# EAGLE board MainBoard (EAGLE 6.1), part 1 of 2
REVISION: A; TITLE: Teton
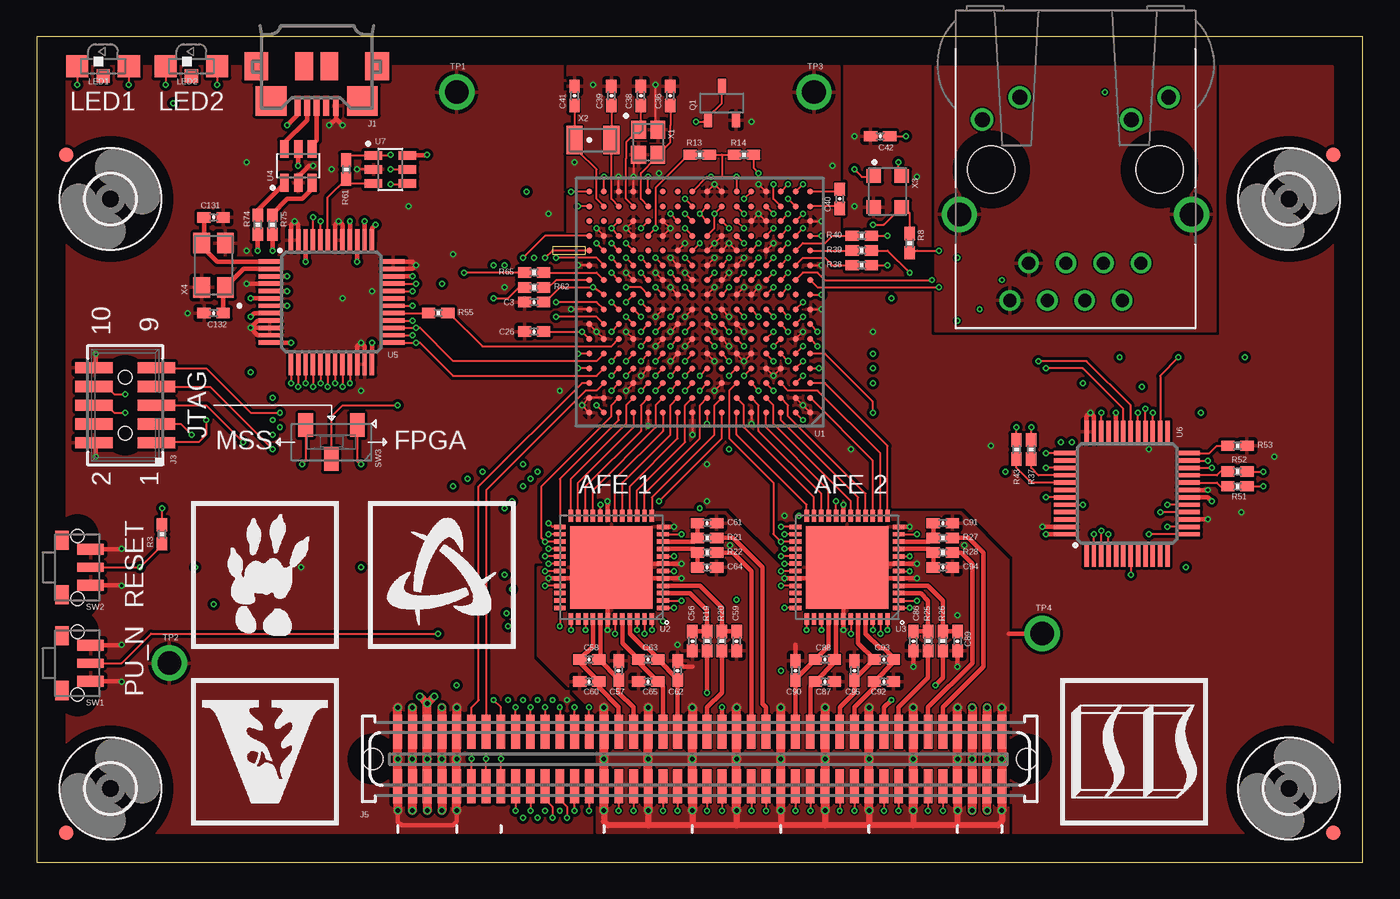
[diagram p0: board, top side]
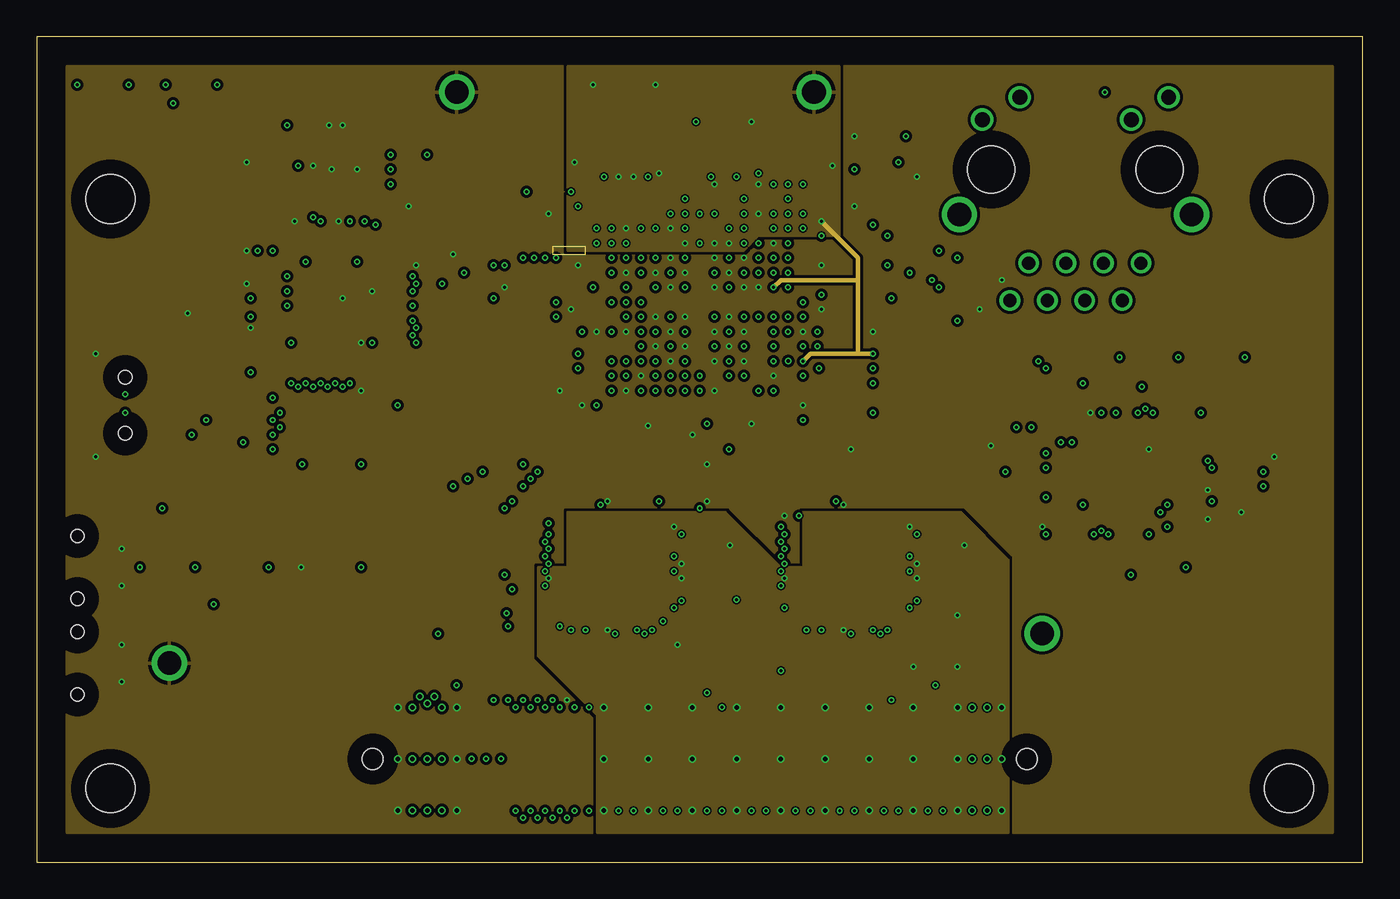
[diagram p1: board, inner layer GND]
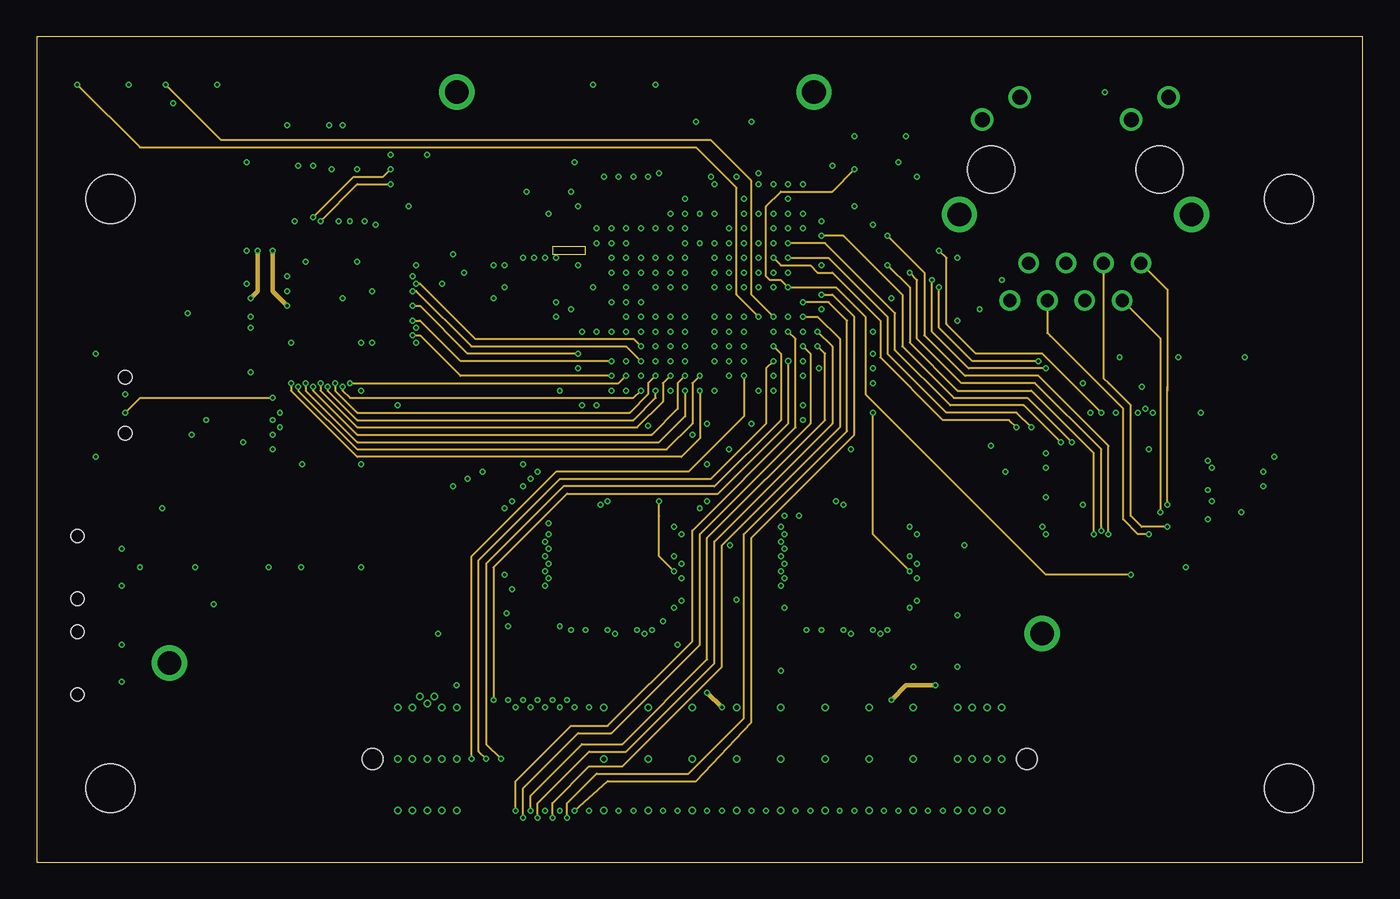
[diagram p2: board, inner layer Inner1]
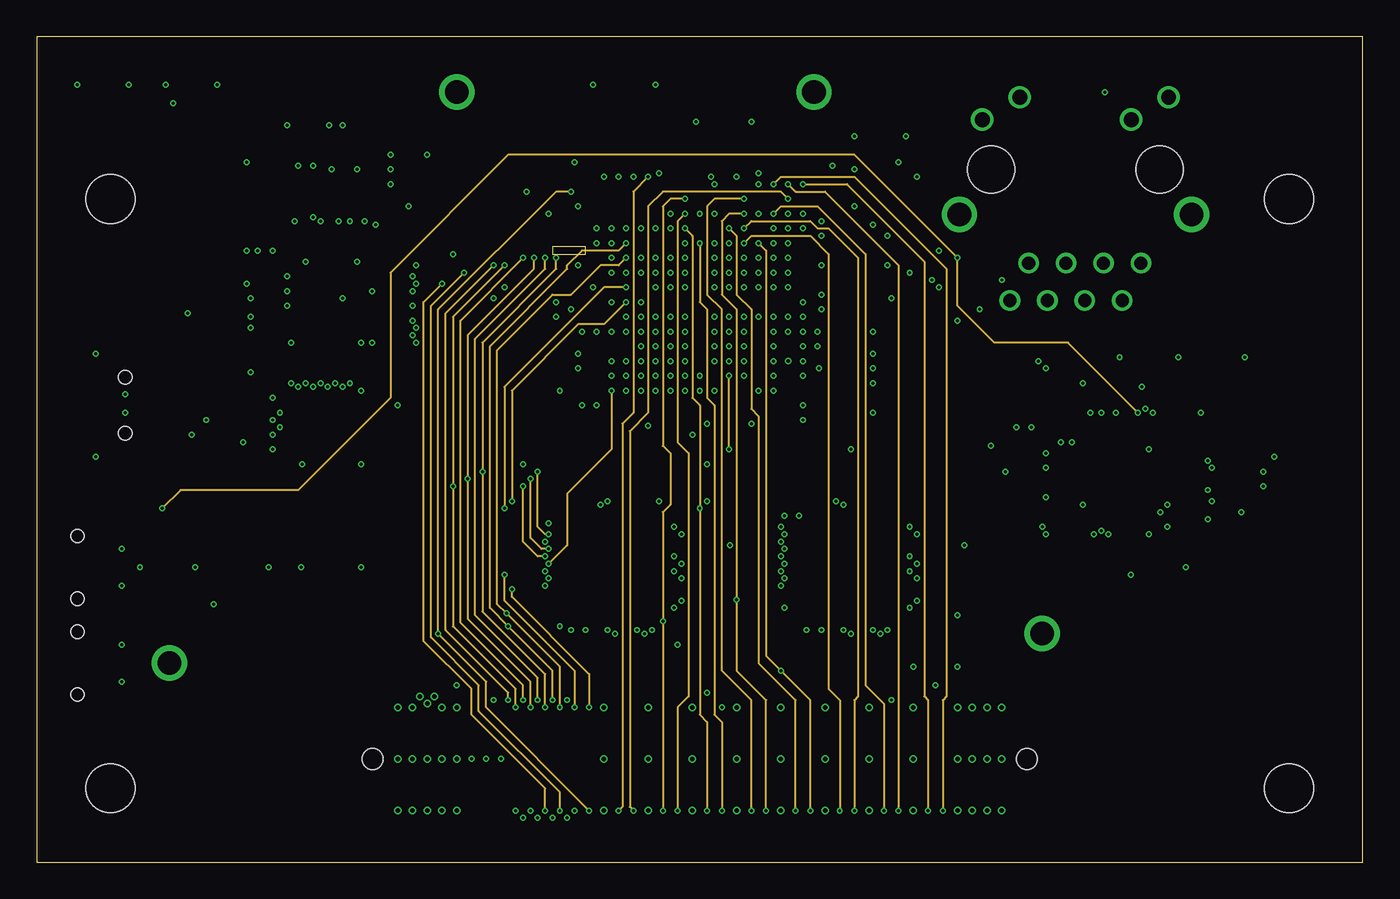
[diagram p3: board, inner layer Inner2]
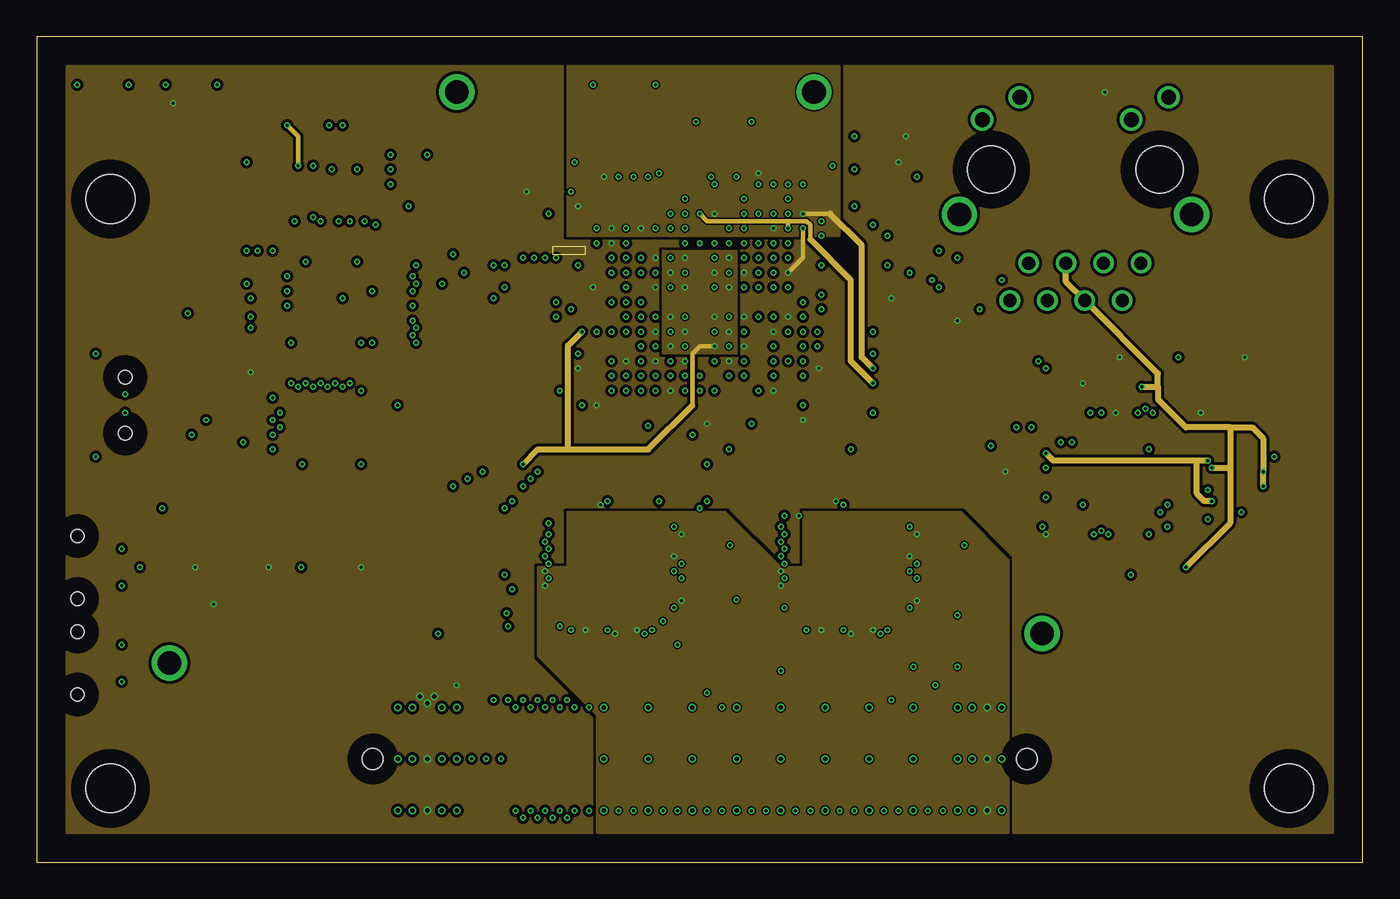
[diagram p4: board, inner layer D3V3]
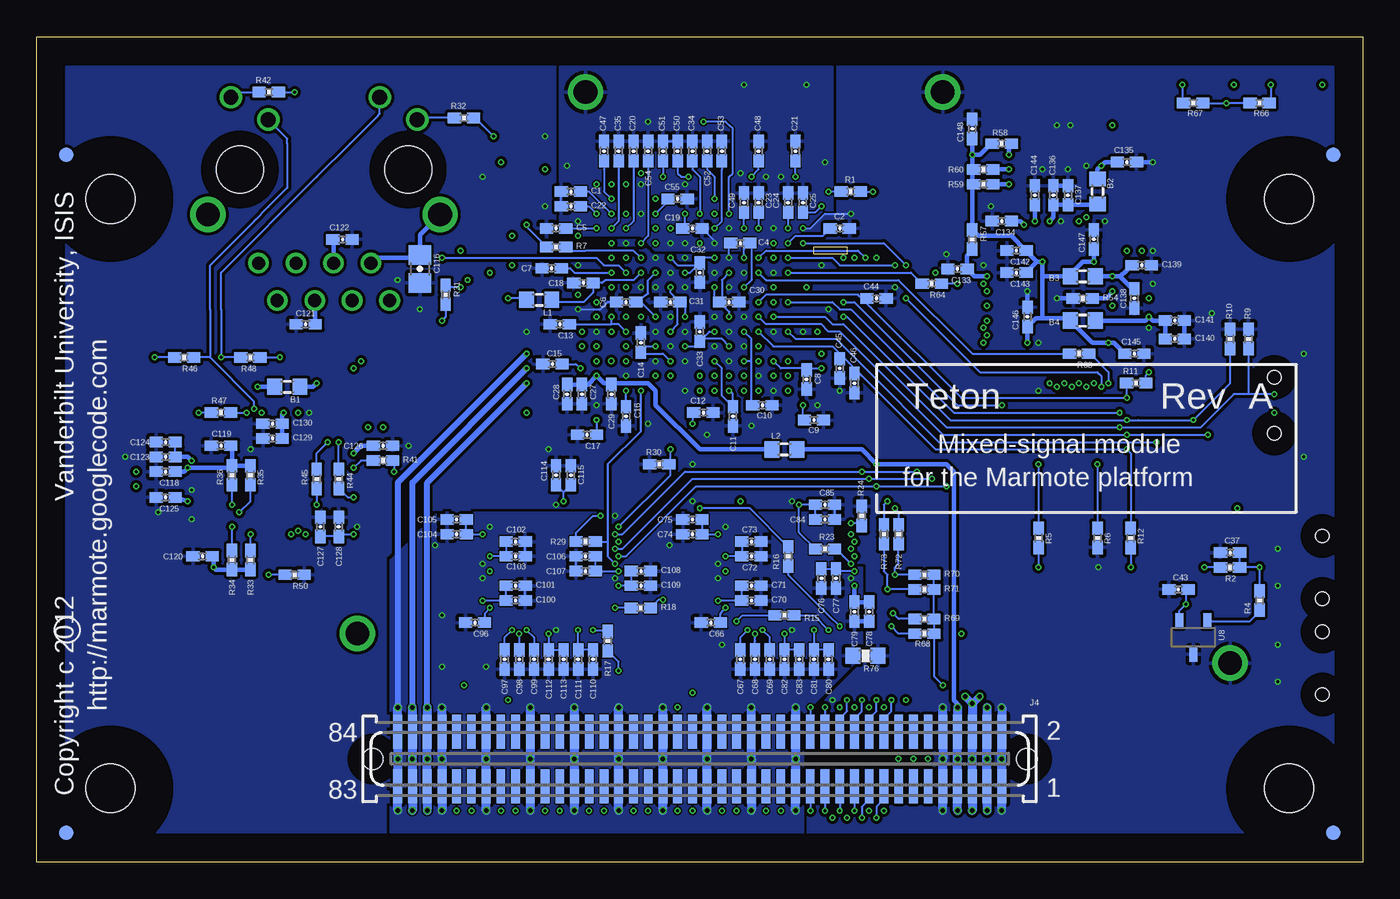
[diagram p5: board, bottom side, seen from below]

Size 90 x 56 mm. Coordinates in mm from the lower left corner, seen from the top.
Outline: 0,0 90,0 90,56 0,56 0,0
Copper layers (1*2*3+14*15*16): Top 0.0356mm / dielectric 5mil / GND 0.0356mm / dielectric 5mil / Inner1 0.0356mm / dielectric 40mil / Inner2 0.0356mm / dielectric 5mil / D3V3 0.0356mm / dielectric 5mil / Bottom 0.0356mm
Design rules: minimum track width 4mil, minimum drill 8mil, track to track 4mil, track to pad 4mil, pad to pad 4mil, via to via 4mil, smd to smd 4mil, copper to edge 40mil, drill to drill 8mil, minimum pad ring 10mil, minimum via ring 4mil, stop-mask expansion 2mil, vias tented up to drill 8mil, thermal gap 10mil
Milling: area 35,41.2 to 37.2,41.8

## Footprints (pad centres in the part's own frame; a part is rotated, then mirrored left to right if it is on the bottom)
L0603 = smd 1 x 1.1: 1 -0.85,0; 2 0.85,0
C0402 = smd 0.9 x 0.7: 1 -0.65,0; 2 0.65,0
C0805 = smd 1.3 x 1.5: 1 -0.95,0; 2 0.95,0
ZX62R-B-5P = smd 0.4 x 1.35: 1 1.3,2.675; 2 0.65,2.675; 3 0,2.675; 4 -0.65,2.675; 5 -1.3,2.675 | smd 2.1 x 2: MNT$1 -3.1,2.35; MNT$2 3.1,2.35 | smd 1.6 x 1.9: MNT$3 -4.1,0; MNT$4 4.1,0 | smd 1.2 x 1.9: MNT$5 -0.85,0; MNT$6 0.85,0
J0011D21B = drill 0.889: 1 4.445,-6.35; 2 3.175,-8.89; 3 1.905,-6.35; 4 0.635,-8.89; 5 -0.635,-6.35; 6 -1.905,-8.89; 7 -3.175,-6.35; 8 -4.445,-8.89 | drill 1.016: 9 6.325,4.902; 10 3.785,3.378; 11 -3.785,4.902; 12 -6.325,3.378 | drill 1.6: H$1 -7.874,-3.048; H$2 7.874,-3.048 | hole 3.2: -5.715,0; 5.715,0
FTSH-105-01-L-DV-K = smd 2.54 x 0.762: 1 -2.121,2.54; 2 2.121,2.54; 3 -2.121,1.27; 4 2.121,1.27; 5 -2.121,0; 6 2.121,0; 7 -2.121,-1.27; 8 2.121,-1.27; 9 -2.121,-2.54; 10 2.121,-2.54 | hole 0.94: 0,1.905; 0,-1.905
71742-3003-BOT = smd 0.6 x 2.3: 1 -20.5,1.85; 2 -20.5,-1.85; 3 -19.5,1.85; 4 -19.5,-1.85; 5 -18.5,1.85; 6 -18.5,-1.85; 7 -17.5,1.85; 8 -17.5,-1.85; 9 -16.5,1.85; 10 -16.5,-1.85; 11 -15.5,1.85; 12 -15.5,-1.85; 13 -14.5,1.85; 14 -14.5,-1.85; 15 -13.5,1.85; 16 -13.5,-1.85; 17 -12.5,1.85; 18 -12.5,-1.85; 19 -11.5,1.85; 20 -11.5,-1.85; 21 -10.5,1.85; 22 -10.5,-1.85; 23 -9.5,1.85; 24 -9.5,-1.85; 25 -8.5,1.85; 26 -8.5,-1.85; 27 -7.5,1.85; 28 -7.5,-1.85; 29 -6.5,1.85; 30 -6.5,-1.85; 31 -5.5,1.85; 32 -5.5,-1.85; 33 -4.5,1.85; 34 -4.5,-1.85; 35 -3.5,1.85; 36 -3.5,-1.85; 37 -2.5,1.85; 38 -2.5,-1.85; 39 -1.5,1.85; 40 -1.5,-1.85; 41 -0.5,1.85; 42 -0.5,-1.85; 43 0.5,1.85; 44 0.5,-1.85; 45 1.5,1.85; 46 1.5,-1.85; 47 2.5,1.85; 48 2.5,-1.85; 49 3.5,1.85; 50 3.5,-1.85; 51 4.5,1.85; 52 4.5,-1.85; 53 5.5,1.85; 54 5.5,-1.85; 55 6.5,1.85; 56 6.5,-1.85; 57 7.5,1.85; 58 7.5,-1.85; 59 8.5,1.85; 60 8.5,-1.85; 61 9.5,1.85; 62 9.5,-1.85; 63 10.5,1.85; 64 10.5,-1.85; 65 11.5,1.85; 66 11.5,-1.85; 67 12.5,1.85; 68 12.5,-1.85; 69 13.5,1.85; 70 13.5,-1.85; 71 14.5,1.85; 72 14.5,-1.85; 73 15.5,1.85; 74 15.5,-1.85; 75 16.5,1.85; 76 16.5,-1.85; 77 17.5,1.85; 78 17.5,-1.85; 79 18.5,1.85; 80 18.5,-1.85; 81 19.5,1.85; 82 19.5,-1.85; 83 20.5,1.85; 84 20.5,-1.85 | hole 1.4: -22.2,0; 22.2,0
71741-0002 = smd 0.6 x 2.3: 1 -20.5,-1.85; 2 -20.5,1.85; 3 -19.5,-1.85; 4 -19.5,1.85; 5 -18.5,-1.85; 6 -18.5,1.85; 7 -17.5,-1.85; 8 -17.5,1.85; 9 -16.5,-1.85; 10 -16.5,1.85; 11 -15.5,-1.85; 12 -15.5,1.85; 13 -14.5,-1.85; 14 -14.5,1.85; 15 -13.5,-1.85; 16 -13.5,1.85; 17 -12.5,-1.85; 18 -12.5,1.85; 19 -11.5,-1.85; 20 -11.5,1.85; 21 -10.5,-1.85; 22 -10.5,1.85; 23 -9.5,-1.85; 24 -9.5,1.85; 25 -8.5,-1.85; 26 -8.5,1.85; 27 -7.5,-1.85; 28 -7.5,1.85; 29 -6.5,-1.85; 30 -6.5,1.85; 31 -5.5,-1.85; 32 -5.5,1.85; 33 -4.5,-1.85; 34 -4.5,1.85; 35 -3.5,-1.85; 36 -3.5,1.85; 37 -2.5,-1.85; 38 -2.5,1.85; 39 -1.5,-1.85; 40 -1.5,1.85; 41 -0.5,-1.85; 42 -0.5,1.85; 43 0.5,-1.85; 44 0.5,1.85; 45 1.5,-1.85; 46 1.5,1.85; 47 2.5,-1.85; 48 2.5,1.85; 49 3.5,-1.85; 50 3.5,1.85; 51 4.5,-1.85; 52 4.5,1.85; 53 5.5,-1.85; 54 5.5,1.85; 55 6.5,-1.85; 56 6.5,1.85; 57 7.5,-1.85; 58 7.5,1.85; 59 8.5,-1.85; 60 8.5,1.85; 61 9.5,-1.85; 62 9.5,1.85; 63 10.5,-1.85; 64 10.5,1.85; 65 11.5,-1.85; 66 11.5,1.85; 67 12.5,-1.85; 68 12.5,1.85; 69 13.5,-1.85; 70 13.5,1.85; 71 14.5,-1.85; 72 14.5,1.85; 73 15.5,-1.85; 74 15.5,1.85; 75 16.5,-1.85; 76 16.5,1.85; 77 17.5,-1.85; 78 17.5,1.85; 79 18.5,-1.85; 80 18.5,1.85; 81 19.5,-1.85; 82 19.5,1.85; 83 20.5,-1.85; 84 20.5,1.85 | hole 1.4: -22.2,0; 22.2,0
LED1208-RA = smd 1.5 x 1.5: 1 -1.75,0; 2 1.75,0 | smd 0.9 x 0.9: 3 0,-0.65
3,3 = hole 3.3: 0,0
FIDUCIAL-1X2 = smd 1 x 1: 1 0,0
SOT23-3L = smd 1 x 0.55: 1 -1.15,0.95; 2 -1.15,-0.95; 3 1.15,0
R0402 = smd 0.9 x 0.7: 1 -0.65,0; 2 0.65,0
R0603 = smd 1 x 1.1: 1 -0.85,0; 2 0.85,0
TL3340 = smd 0.75 x 1.8: 1 1.225,2.4; 3 -1.225,2.4 | smd 0.6 x 1.8: 2 0,2.4 | smd 1.3 x 0.9: MNT$1 -1.85,0.45; MNT$2 1.85,0.45 | hole 0.9: 2.125,1.5; -2.125,1.5
SWITCH-DIP-CJS = smd 1 x 1.6: 1 -1.75,-1.15; 2 0,1.15; 3 1.75,-1.15
TESTPOINT = drill 1.6: 1 0,0
FG256 = smd 0.4 x 0.4: A1 -7.5,7.5; A2 -6.5,7.5; A3 -5.5,7.5; A4 -4.5,7.5; A5 -3.5,7.5; A6 -2.5,7.5; A7 -1.5,7.5; A8 -0.5,7.5; A9 0.5,7.5; A10 1.5,7.5; A11 2.5,7.5; A12 3.5,7.5; A13 4.5,7.5; A14 5.5,7.5; A15 6.5,7.5; A16 7.5,7.5; B1 -7.5,6.5; B2 -6.5,6.5; B3 -5.5,6.5; B4 -4.5,6.5; B5 -3.5,6.5; B6 -2.5,6.5; B7 -1.5,6.5; B8 -0.5,6.5; B9 0.5,6.5; B10 1.5,6.5; B11 2.5,6.5; B12 3.5,6.5; B13 4.5,6.5; B14 5.5,6.5; B15 6.5,6.5; B16 7.5,6.5; C1 -7.5,5.5; C2 -6.5,5.5; C3 -5.5,5.5; C4 -4.5,5.5; C5 -3.5,5.5; C6 -2.5,5.5; C7 -1.5,5.5; C8 -0.5,5.5; C9 0.5,5.5; C10 1.5,5.5; C11 2.5,5.5; C12 3.5,5.5; C13 4.5,5.5; C14 5.5,5.5; C15 6.5,5.5; C16 7.5,5.5; D1 -7.5,4.5; D2 -6.5,4.5; D3 -5.5,4.5; D4 -4.5,4.5; D5 -3.5,4.5; D6 -2.5,4.5; D7 -1.5,4.5; D8 -0.5,4.5; D9 0.5,4.5; D10 1.5,4.5; D11 2.5,4.5; D12 3.5,4.5; D13 4.5,4.5; D14 5.5,4.5; D15 6.5,4.5; D16 7.5,4.5; E1 -7.5,3.5; E2 -6.5,3.5; E3 -5.5,3.5; E4 -4.5,3.5; E5 -3.5,3.5; E6 -2.5,3.5; E7 -1.5,3.5; E8 -0.5,3.5; E9 0.5,3.5; E10 1.5,3.5; E11 2.5,3.5; E12 3.5,3.5; E13 4.5,3.5; E14 5.5,3.5; E15 6.5,3.5; E16 7.5,3.5; F1 -7.5,2.5; F2 -6.5,2.5; F3 -5.5,2.5; F4 -4.5,2.5; F5 -3.5,2.5; F6 -2.5,2.5; F7 -1.5,2.5; F8 -0.5,2.5; F9 0.5,2.5; F10 1.5,2.5; F11 2.5,2.5; F12 3.5,2.5; F13 4.5,2.5; F14 5.5,2.5; F15 6.5,2.5; F16 7.5,2.5; G1 -7.5,1.5; G2 -6.5,1.5; G3 -5.5,1.5; G4 -4.5,1.5; G5 -3.5,1.5; G6 -2.5,1.5; G7 -1.5,1.5; G8 -0.5,1.5; G9 0.5,1.5; G10 1.5,1.5; G11 2.5,1.5; G12 3.5,1.5; G13 4.5,1.5; G14 5.5,1.5; G15 6.5,1.5; G16 7.5,1.5; H1 -7.5,0.5; H2 -6.5,0.5; H3 -5.5,0.5; H4 -4.5,0.5; H5 -3.5,0.5; H6 -2.5,0.5; H7 -1.5,0.5; H8 -0.5,0.5; H9 0.5,0.5; H10 1.5,0.5; H11 2.5,0.5; H12 3.5,0.5; H13 4.5,0.5; H14 5.5,0.5; H15 6.5,0.5; H16 7.5,0.5; J1 -7.5,-0.5; J2 -6.5,-0.5; J3 -5.5,-0.5; J4 -4.5,-0.5; J5 -3.5,-0.5; J6 -2.5,-0.5; J7 -1.5,-0.5; J8 -0.5,-0.5; J9 0.5,-0.5; J10 1.5,-0.5; J11 2.5,-0.5; J12 3.5,-0.5; J13 4.5,-0.5; J14 5.5,-0.5; J15 6.5,-0.5; J16 7.5,-0.5; K1 -7.5,-1.5; K2 -6.5,-1.5; K3 -5.5,-1.5; K4 -4.5,-1.5; K5 -3.5,-1.5; K6 -2.5,-1.5; K7 -1.5,-1.5; K8 -0.5,-1.5; K9 0.5,-1.5; K10 1.5,-1.5; K11 2.5,-1.5; K12 3.5,-1.5; K13 4.5,-1.5; K14 5.5,-1.5; K15 6.5,-1.5; K16 7.5,-1.5; L1 -7.5,-2.5; L2 -6.5,-2.5; L3 -5.5,-2.5; L4 -4.5,-2.5; L5 -3.5,-2.5; L6 -2.5,-2.5; L7 -1.5,-2.5; L8 -0.5,-2.5; L9 0.5,-2.5; L10 1.5,-2.5; L11 2.5,-2.5; L12 3.5,-2.5; L13 4.5,-2.5; L14 5.5,-2.5; L15 6.5,-2.5; L16 7.5,-2.5; M1 -7.5,-3.5; M2 -6.5,-3.5; M3 -5.5,-3.5; M4 -4.5,-3.5; M5 -3.5,-3.5; M6 -2.5,-3.5; M7 -1.5,-3.5; M8 -0.5,-3.5; M9 0.5,-3.5; M10 1.5,-3.5; M11 2.5,-3.5; M12 3.5,-3.5; M13 4.5,-3.5; M14 5.5,-3.5; M15 6.5,-3.5; M16 7.5,-3.5; N1 -7.5,-4.5; N2 -6.5,-4.5; N3 -5.5,-4.5; N4 -4.5,-4.5; N5 -3.5,-4.5; N6 -2.5,-4.5; N7 -1.5,-4.5; N8 -0.5,-4.5; N9 0.5,-4.5; N10 1.5,-4.5; N11 2.5,-4.5; N12 3.5,-4.5; N13 4.5,-4.5; N14 5.5,-4.5; N15 6.5,-4.5; N16 7.5,-4.5; P1 -7.5,-5.5; P2 -6.5,-5.5; P3 -5.5,-5.5; P4 -4.5,-5.5; P5 -3.5,-5.5; P6 -2.5,-5.5; P7 -1.5,-5.5; P8 -0.5,-5.5; P9 0.5,-5.5; P10 1.5,-5.5; P11 2.5,-5.5; P12 3.5,-5.5; P13 4.5,-5.5; P14 5.5,-5.5; P15 6.5,-5.5; P16 7.5,-5.5; R1 -7.5,-6.5; R2 -6.5,-6.5; R3 -5.5,-6.5; R4 -4.5,-6.5; R5 -3.5,-6.5; R6 -2.5,-6.5; R7 -1.5,-6.5; R8 -0.5,-6.5; R9 0.5,-6.5; R10 1.5,-6.5; R11 2.5,-6.5; R12 3.5,-6.5; R13 4.5,-6.5; R14 5.5,-6.5; R15 6.5,-6.5; R16 7.5,-6.5; T1 -7.5,-7.5; T2 -6.5,-7.5; T3 -5.5,-7.5; T4 -4.5,-7.5; T5 -3.5,-7.5; T6 -2.5,-7.5; T7 -1.5,-7.5; T8 -0.5,-7.5; T9 0.5,-7.5; T10 1.5,-7.5; T11 2.5,-7.5; T12 3.5,-7.5; T13 4.5,-7.5; T14 5.5,-7.5; T15 6.5,-7.5; T16 7.5,-7.5
TQFN-48 = smd 0.8 x 0.3: 1 -3.5,2.75; 2 -3.5,2.25; 3 -3.5,1.75; 4 -3.5,1.25; 5 -3.5,0.75; 6 -3.5,0.25; 7 -3.5,-0.25; 8 -3.5,-0.75; 9 -3.5,-1.25; 10 -3.5,-1.75; 11 -3.5,-2.25; 12 -3.5,-2.75; 25 3.5,-2.75; 26 3.5,-2.25; 27 3.5,-1.75; 28 3.5,-1.25; 29 3.5,-0.75; 30 3.5,-0.25; 31 3.5,0.25; 32 3.5,0.75; 33 3.5,1.25; 34 3.5,1.75; 35 3.5,2.25; 36 3.5,2.75 | smd 0.3 x 0.8: 13 -2.75,-3.5; 14 -2.25,-3.5; 15 -1.75,-3.5; 16 -1.25,-3.5; 17 -0.75,-3.5; 18 -0.25,-3.5; 19 0.25,-3.5; 20 0.75,-3.5; 21 1.25,-3.5; 22 1.75,-3.5; 23 2.25,-3.5; 24 2.75,-3.5; 37 2.75,3.5; 38 2.25,3.5; 39 1.75,3.5; 40 1.25,3.5; 41 0.75,3.5; 42 0.25,3.5; 43 -0.25,3.5; 44 -0.75,3.5; 45 -1.25,3.5; 46 -1.75,3.5; 47 -2.25,3.5; 48 -2.75,3.5 | smd 5.6 x 5.6: EXP 0,0
SOT23-6L = smd 1.2 x 0.6: 1 -1.15,0.95; 2 -1.15,0; 3 -1.15,-0.95; 4 1.15,-0.95; 5 1.15,0; 6 1.15,0.95
LQFP-48 = smd 1.5 x 0.3: 1 -4.2,2.75; 2 -4.2,2.25; 3 -4.2,1.75; 4 -4.2,1.25; 5 -4.2,0.75; 6 -4.2,0.25; 7 -4.2,-0.25; 8 -4.2,-0.75; 9 -4.2,-1.25; 10 -4.2,-1.75; 11 -4.2,-2.25; 12 -4.2,-2.75; 25 4.2,-2.75; 26 4.2,-2.25; 27 4.2,-1.75; 28 4.2,-1.25; 29 4.2,-0.75; 30 4.2,-0.25; 31 4.2,0.25; 32 4.2,0.75; 33 4.2,1.25; 34 4.2,1.75; 35 4.2,2.25; 36 4.2,2.75 | smd 0.3 x 1.5: 13 -2.75,-4.2; 14 -2.25,-4.2; 15 -1.75,-4.2; 16 -1.25,-4.2; 17 -0.75,-4.2; 18 -0.25,-4.2; 19 0.25,-4.2; 20 0.75,-4.2; 21 1.25,-4.2; 22 1.75,-4.2; 23 2.25,-4.2; 24 2.75,-4.2; 37 2.75,4.2; 38 2.25,4.2; 39 1.75,4.2; 40 1.25,4.2; 41 0.75,4.2; 42 0.25,4.2; 43 -0.25,4.2; 44 -0.75,4.2; 45 -1.25,4.2; 46 -1.75,4.2; 47 -2.25,4.2; 48 -2.75,4.2
ECX-2236 = smd 1.2 x 1: 1 -0.85,-0.65; 2 0.85,-0.65; 3 0.85,0.65; 4 -0.85,0.65
ECX-31B = smd 1.1 x 1.9: 1 -1.25,0; 2 1.25,0
ASEM1 = smd 0.9 x 1: 1 -1.05,-0.95; 2 1.05,-0.95; 3 1.05,0.95; 4 -1.05,0.95
ECX-42 = smd 1.4 x 1.15: 1 -1.5,-0.8; 2 1.5,-0.8; 3 1.5,0.8; 4 -1.5,0.8

## Placement (x,y rotation side)
B1  70R/4A  [L0603]  73,32.25 180 bottom
B2  600R/0.5A  [L0603]  18,45.5 270 bottom
B3  600R/0.5A  [L0603]  19,39.75 0 bottom
B4  600R/0.5A  [L0603]  19,36.75 0 bottom
C1  2.2uF  [C0402]  53.75,45.5 180 bottom
C2  0.1uF  [C0402]  35.5,43 0 bottom
C3  0.1uF  [C0402]  33.75,38 180 top
C4  0.1uF  [C0402]  42.25,42 180 bottom
C5  0.1uF  [C0402]  54.75,43 180 bottom
C6  0.1uF  [C0402]  50,38 180 bottom
C7  0.1uF  [C0402]  55.05,40.3 180 bottom
C8  0.1uF  [C0402]  37.75,32.75 270 bottom
C9  0.1uF  [C0402]  37.25,30 0 bottom
C10  0.1uF  [C0402]  40.75,31 0 bottom
C11  0.1uF  [C0402]  42.75,30.25 270 bottom
C12  0.1uF  [C0402]  44.75,30.5 0 bottom
C13  0.1uF  [C0402]  54.5,36.5 180 bottom
C14  0.1uF  [C0402]  49,35.25 90 bottom
C15  0.1uF  [C0402]  55,33.8 180 bottom
C16  0.1uF  [C0402]  50,30.25 270 bottom
C17  0.1uF  [C0402]  52.65,29 180 bottom
C18  0.1uF  [C0402]  52.9,39.3 180 bottom
C19  0.1uF  [C0402]  45.5,43 0 bottom
C20  0.1uF  [C0402]  49.5,48.25 90 bottom
C21  0.1uF  [C0402]  38.5,48.25 90 bottom
C22  0.1uF  [C0402]  53.75,44.5 180 bottom
C23  0.1uF  [C0402]  41,44.75 90 bottom
C24  0.1uF  [C0402]  39,44.75 90 bottom
C25  0.1uF  [C0402]  38,44.75 90 bottom
C26  0.1uF  [C0402]  33.75,36 180 top
C27  4.7uF  [C0402]  53,31.75 270 bottom
C28  0.1uF  [C0402]  54,31.75 270 bottom
C29  0.01uF  [C0402]  51,31.75 270 bottom
C30  0.1uF  [C0402]  43,38 0 bottom
C31  0.1uF  [C0402]  47,38 180 bottom
C32  0.1uF  [C0402]  45,40 270 bottom
C33  0.1uF  [C0402]  45,36 90 bottom
C34  0.1uF  [C0402]  45.5,48.25 90 bottom
C35  0.1uF  [C0402]  50.5,48.25 90 bottom
C36  10pF  [C0402]  43,52 90 top
C37  0.1uF  [C0402]  9,21 180 bottom
C38  10pF  [C0402]  41,52 90 top
C39  4pF  [C0402]  39,52 90 top
C40  2.2uF  [C0402]  54.5,45 90 top
C41  4pF  [C0402]  36.5,52 90 top
C42  0.01uF  [C0402]  57.25,49.25 180 top
C43  0.1uF  [C0402]  12.5,18.5 180 bottom
C44  0.1uF  [C0402]  33,38.25 0 bottom
C45  0.33uF  [C0402]  35.5,33.5 270 bottom
C46  0.01uF  [C0402]  34.5,32.5 270 bottom
C47  [C0402]  51.5,48.25 90 bottom
C48  [C0402]  41,48.25 90 bottom
C49  4.7uF  [C0402]  42,44.75 90 bottom
C50  4.7uF  [C0402]  46.5,48.25 90 bottom
C51  4.7uF  [C0402]  47.5,48.25 90 bottom
C52  [C0402]  44.5,48.25 90 bottom
C53  [C0402]  43.5,48.25 90 bottom
C54  [C0402]  48.5,48.25 90 bottom
C55  [C0402]  46.5,45 0 bottom
C56  22pF  [C0402]  44.5,15 270 top
C57  [C0402]  39.5,13 90 top
C58  [C0402]  37.5,13.75 180 top
C59  22pF  [C0402]  47.5,15 90 top
C60  [C0402]  37.5,12.25 0 top
C61  22pF  [C0402]  45.5,23 0 top
C62  [C0402]  43.5,13 90 top
C63  [C0402]  41.5,13.75 180 top
C64  22pF  [C0402]  45.5,20 180 top
C65  [C0402]  41.5,12.25 0 top
C66  0.33uF  [C0402]  44.25,16.25 180 bottom
C67  0.33uF  [C0402]  42.25,13.75 270 bottom
C68  0.33uF  [C0402]  41.25,13.75 270 bottom
C69  0.1uF  [C0402]  40.25,13.75 270 bottom
C70  2.2uF  [C0402]  41.5,17.75 0 bottom
C71  0.1uF  [C0402]  41.5,18.75 0 bottom
C72  2.2uF  [C0402]  41.5,20.75 0 bottom
C73  0.1uF  [C0402]  41.5,21.75 0 bottom
C74  2.2uF  [C0402]  45.5,22.25 180 bottom
C75  0.1uF  [C0402]  45.5,23.25 180 bottom
C76  2.2uF  [C0402]  36.75,19.25 270 bottom
C77  0.1uF  [C0402]  35.75,19.25 270 bottom
C78  2.2uF  [C0402]  33.5,17 270 bottom
C79  0.1uF  [C0402]  34.5,17 270 bottom
C80  2.2uF  [C0402]  36.25,13.75 270 bottom
C81  0.1uF  [C0402]  37.25,13.75 270 bottom
C82  2.2uF  [C0402]  39.25,13.75 270 bottom
C83  0.1uF  [C0402]  38.25,13.75 270 bottom
C84  2.2uF  [C0402]  36.5,23.25 0 bottom
C85  0.1uF  [C0402]  36.5,24.25 0 bottom
C86  22pF  [C0402]  59.5,15 270 top
C87  [C0402]  53.5,12.25 0 top
C88  [C0402]  53.5,13.75 180 top
C89  22pF  [C0402]  62.5,15 90 top
C90  [C0402]  51.5,13 270 top
C91  22pF  [C0402]  61.5,23 0 top
C92  [C0402]  57.5,12.25 0 top
C93  [C0402]  57.5,13.75 180 top
C94  22pF  [C0402]  61.5,20 180 top
C95  [C0402]  55.5,13 270 top
C96  0.33uF  [C0402]  60.25,16.25 180 bottom
C97  0.33uF  [C0402]  58.25,13.75 270 bottom
C98  0.33uF  [C0402]  57.25,13.75 270 bottom
C99  0.1uF  [C0402]  56.25,13.75 270 bottom
C100  2.2uF  [C0402]  57.5,17.75 0 bottom
C101  0.1uF  [C0402]  57.5,18.75 0 bottom
C102  2.2uF  [C0402]  57.5,20.75 0 bottom
C103  0.1uF  [C0402]  57.5,21.75 0 bottom
C104  2.2uF  [C0402]  61.5,22.25 180 bottom
C105  0.1uF  [C0402]  61.5,23.25 180 bottom
C106  2.2uF  [C0402]  52.75,20.75 180 bottom
C107  0.1uF  [C0402]  52.75,19.75 180 bottom
C108  2.2uF  [C0402]  49,19.75 0 bottom
C109  0.1uF  [C0402]  49,18.75 0 bottom
C110  2.2uF  [C0402]  52.25,13.75 270 bottom
C111  0.1uF  [C0402]  53.25,13.75 270 bottom
C112  2.2uF  [C0402]  55.25,13.75 270 bottom
C113  0.1uF  [C0402]  54.25,13.75 270 bottom
C114  2.2uF  [C0402]  54.75,26.25 90 bottom
C115  0.1uF  [C0402]  53.75,26.25 90 bottom
C116  1000pF  [C0805]  64,40.25 270 bottom
C118  0.1uF  [C0402]  81.25,26.5 180 bottom
C119  0.1uF  [C0402]  77.5,28.25 180 bottom
C120  0.1uF  [C0402]  78.75,20.75 180 bottom
C121  0.1uF  [C0402]  71.75,36.5 180 bottom
C122  0.1uF  [C0402]  69.25,42.25 0 bottom
C123  4.7uF  [C0402]  81.25,27.5 180 bottom
C124  0.1uF  [C0402]  81.25,28.5 180 bottom
C125  0.1uF  [C0402]  81.25,24.75 180 bottom
C126  0.1uF  [C0402]  66.5,28.25 0 bottom
C127  4.7uF  [C0402]  70.75,22.75 90 bottom
C128  0.1uF  [C0402]  69.5,22.75 90 bottom
C129  4.7uF  [C0402]  74,28.75 180 bottom
C130  0.1uF  [C0402]  74,29.75 180 bottom
C131  10pF  [C0402]  12,43.75 0 top
C132  10pF  [C0402]  12,37.25 180 top
C133  0.01uF  [C0402]  27.5,40.25 180 bottom
C134  0.1uF  [C0402]  24.5,43.5 180 bottom
C135  0.01uF  [C0402]  16,47.5 0 bottom
C136  4.7uF  [C0402]  21,45.25 90 bottom
C137  0.1uF  [C0402]  20,45.25 90 bottom
C138  4.7uF  [C0402]  15.5,38.25 270 bottom
C139  0.1uF  [C0402]  15,40.5 0 bottom
C140  4.7uF  [C0402]  12.75,35.5 0 bottom
C141  0.1uF  [C0402]  12.75,36.75 0 bottom
C142  4.7uF  [C0402]  23.5,41.5 180 bottom
C143  0.1uF  [C0402]  23.5,40 180 bottom
C144  0.1uF  [C0402]  22.25,45.25 90 bottom
C145  0.1uF  [C0402]  15.5,34.5 0 bottom
C146  0.1uF  [C0402]  22.75,37 90 bottom
C147  0.1uF  [C0402]  18.25,42.25 90 bottom
C148  0.1uF  [C0402]  26.5,49.75 90 bottom
J1  CON-ZX62R-B-5P  [ZX62R-B-5P]  19,54 180 top
J2  CON-RJ45-J0011D21BNL  [J0011D21B]  70.5,47 0 top
J3  CON-FTSH-105-01-L-DV-K  [FTSH-105-01-L-DV-K]  6,31 180 top
J4  CON-71741-2184-BOT  [71742-3003-BOT]  45,7 180 bottom
J5  CON-71741-2184-TOP  [71741-0002]  45,7 0 top
L1  33nH  [L0603]  55.9,38.15 180 bottom
L2  33nH  [L0603]  39.25,28 0 bottom
LED1  [LED1208-RA]  4.5,54 0 top
LED2  [LED1208-RA]  10.5,54 0 top
LOGO1  LOGO-VANDERBILT-600MIL-10MM-SS  [LOGO-VANDERBILT-10MM-SILKSCREEN]  10.5,2.5 0 top
LOGO2  LOGO-ISIS-600MIL-10MM-SS  [LOGO-ISIS-10MM-SILKSCREEN]  69.5,2.5 0 top
LOGO3  LOGO-MARMOTE-600MIL-10MM-SS  [LOGO-MARMOTE-10MM-SILKSCREEN]  10.5,14.5 0 top
LOGO4  LOGO-SMARTFUSION-600MIL-10MM-SS  [LOGO-SMARTFUSION-10MM-SILKSCREEN]  22.5,14.5 0 top
M1  MOUNT-HOLE3.3  [3,3]  5,5 0 top
M2  MOUNT-HOLE3.3  [3,3]  5,45 0 top
M3  MOUNT-HOLE3.3  [3,3]  85,45 0 top
M4  MOUNT-HOLE3.3  [3,3]  85,5 0 top
M5  FIDUCIAL1X2  [FIDUCIAL-1X2]  2,2 0 top
M6  FIDUCIAL1X2  [FIDUCIAL-1X2]  2,48 0 top
M7  FIDUCIAL1X2  [FIDUCIAL-1X2]  88,48 0 top
M8  FIDUCIAL1X2  [FIDUCIAL-1X2]  88,2 0 top
M9  FIDUCIAL1X2  [FIDUCIAL-1X2]  2,2 90 bottom
M10  FIDUCIAL1X2  [FIDUCIAL-1X2]  2,48 0 bottom
M11  FIDUCIAL1X2  [FIDUCIAL-1X2]  88,48 0 bottom
M12  FIDUCIAL1X2  [FIDUCIAL-1X2]  88,2 0 bottom
Q1  MMBT3904  [SOT23-3L]  46.5,51.5 90 top
R1  10k  [R0402]  34.75,45.5 180 bottom
R2  10k  [R0402]  9,20 180 bottom
R3  39  [R0402]  8.5,22.25 90 top
R4  0  [R0402]  7,17.75 90 bottom
R5  1k  [R0402]  22,22 270 bottom
R6  1k  [R0402]  18,22 90 bottom
R7  39  [R0402]  54.75,41.75 0 bottom
R8  39  [R0402]  59.25,42 270 top
R9  1k  [R0402]  7.75,35.5 270 bottom
R10  1k  [R0402]  9,35.5 270 bottom
R11  0  [R0402]  15.37,32.5 0 bottom
R12  0  [R0402]  15.75,22 270 bottom
R13  0  [R0402]  45,48 0 top
R14  0  [R0402]  48,48 0 top
R15  0  [R0402]  39.25,16.75 180 bottom
R16  0  [R0402]  39,20.75 90 bottom
R17  0  [R0402]  51.25,15 270 bottom
R18  0  [R0402]  49,17.25 0 bottom
R19  24.9  [R0402]  45.5,15 270 top
R20  24.9  [R0402]  46.5,15 270 top
R21  24.9  [R0402]  45.5,22 0 top
R22  24.9  [R0402]  45.5,21 0 top
R23  100k  [R0402]  36.5,21.25 180 bottom
R24  100k  [R0402]  34,23.5 270 bottom
R25  24.9  [R0402]  60.5,15 270 top
R26  24.9  [R0402]  61.5,15 270 top
R27  24.9  [R0402]  61.5,22 0 top
R28  24.9  [R0402]  61.5,21 0 top
R29  100k  [R0402]  52.75,21.75 180 bottom
R30  100k  [R0402]  47.75,27 0 bottom
R31  1.5k  [R0402]  62.25,38.5 270 bottom
R32  100  [R0402]  61,50.5 0 bottom
R33  49.9  [R0402]  75.5,20.5 270 bottom
R34  49.9  [R0402]  76.75,20.5 270 bottom
R35  49.9  [R0402]  75.5,26.25 90 bottom
R36  49.9  [R0402]  76.75,26.25 90 bottom
R37  22  [R0402]  67.5,28 270 top
R38  22  [R0402]  56,40.5 0 top
R39  22  [R0402]  56,41.5 0 top
R40  22  [R0402]  56,42.5 0 top
R41  2.2k  [R0402]  66.5,27.25 0 bottom
R42  100  [R0402]  74.25,52.25 0 bottom
R43  22  [R0402]  66.5,28 270 top
R44  22  [R0402]  69.5,26 270 bottom
R45  22  [R0402]  71,26 270 bottom
R46  2.2k  [R0402]  80,34.25 180 bottom
R47  2.2k  [R0402]  77.5,30.5 180 bottom
R48  2.2k  [R0402]  75.5,34.25 0 bottom
R50  2.2k  [R0402]  72.5,19.5 180 bottom
R51  2.2k  [R0402]  81.5,25.5 0 top
R52  2.2k  [R0402]  81.5,26.5 0 top
R53  4.87k  [R0402]  81.5,28.25 180 top
R54  12k  [R0402]  19,38.25 0 bottom
R55  27  [R0402]  27.25,37.25 0 top
R57  10k  [R0402]  26.5,42.25 270 bottom
R58  10k  [R0402]  24.5,48.75 180 bottom
R59  10k  [R0402]  25.75,46 180 bottom
R60  10k  [R0402]  25.75,47 180 bottom
R61  2k  [R0402]  21,47 270 top
R62  39  [R0402]  33.75,39 0 top
R63  39  [R0402]  19.25,34.5 180 bottom
R64  39  [R0402]  29.25,39.25 180 bottom
R65  39  [R0402]  33.75,40 0 top
R66  100  [R0402]  7,51.5 180 bottom
R67  330  [R0402]  11.5,51.5 0 bottom
R68  100k  [R0402]  29.75,15.5 0 bottom
R69  100k  [R0402]  29.75,16.5 0 bottom
R70  4.7k  [R0402]  29.75,19.5 0 bottom
R71  4.7k  [R0402]  29.75,18.5 0 bottom
R72  100  [R0402]  31.5,22.25 270 bottom
R73  100  [R0402]  32.5,22.25 270 bottom
R74  0  [R0402]  15,43.25 270 top
R75  0  [R0402]  16,43.25 270 top
R76  0  [R0603]  33.75,14 180 bottom
SW1  SWITCH-ESWITCH-TL3340G  [TL3340]  1.25,13.5 270 top
SW2  SWITCH-ESWITCH-TL3340G  [TL3340]  1.25,20 270 top
SW3  SWITCH-CJS-1200TA  [SWITCH-DIP-CJS]  20,28.5 180 top
TP1  TESTPOINT-YELLOW  [TESTPOINT]  28.5,52.25 0 top
TP2  TESTPOINT-YELLOW  [TESTPOINT]  9,13.5 0 top
TP3  TESTPOINT-GREEN  [TESTPOINT]  52.75,52.25 0 top
TP4  TESTPOINT-GREEN  [TESTPOINT]  68.25,15.5 0 top
U1  A2F500M3G-1FGG256  [FG256]  45,38 180 top
U2  MAX19706-T4877-4  [TQFN-48]  39,20 180 top
U3  MAX19706-T4877-4  [TQFN-48]  55,20 180 top
U4  USBLC6-2SC6  [SOT23-6L]  17.75,47.25 90 top
U5  FT232HL  [LQFP-48]  20,38 0 top
U6  DP83848C-VBH48A  [LQFP-48]  74,25 90 top
U7  93LC56BT-OT  [SOT23-6L]  24,47 0 top
U8  DS1818-10-SOT-23  [SOT23-3L]  11.5,15.25 270 bottom
X1  ECX-2236-200  [ECX-2236]  41.5,48.85 270 top
X2  ECX-31B  [ECX-31B]  37.75,49 0 top
X3  ASEM1-C  [ASEM1]  57.75,45.5 270 top
X4  ECX-42-120  [ECX-42]  12,40.5 90 top

## Library data of the parts
B1 = MainBoard; CURRENT-RATING: 4 A; DIGI-KEY#: 490-5224-1-ND; IMPEDANCE: 70 Ohm @ 100 MHz; MF: Murata; MPN: BLM18SG700TN1D
B2 B4 = MainBoard; CURRENT-RATING: 0.5 A; DIGI-KEY#: 490-3994-2-ND; IMPEDANCE: 600 Ohm @ 100 MHz; MF: Murata; MPN: BLM18EG601SN1D
B3 = MainBoard; AUTHOR: Sandor Szilvasi; AUTHOREMAIL: sandor.szilvasi@vanderbilt.edu; CURRENT-RATING: 0.5 A; DIGI-KEY#: 490-3994-2-ND; IMPEDANCE: 600 Ohm @ 100 MHz; MF: Murata; MPN: BLM18EG601SN1D; PAGE1: Cover Page; PAGE2: FPGA Power Supply; PAGE3: Clock and Reset; PAGE4: Ethernet (RMII); PAGE5: Digital Signal; PAGE6: Analog Front-Ends; PAGE7: Connectors; PAGE9: Caps, Pulls and TPs; REVISION: A; TITLE: Main Board
C1 C3 C4 C8-C10 C12-C15 C18 C22-C35 C40 C42-C44 C49-C51 C56 C59 C61 C64 C66-C70 C72-C86 C89 C91 C94 C96-C115 C118-C135 C141-C143 C148 J2 L1 M1-M12 R2 R3 R6-R10 R13 R19 R20 R23-R32 R41-R45 R57 R61 R66-R75 = MainBoard
C2 C5-C7 C11 C16 C17 C19-C21 C36 C38 C136 C137 C139 C144-C147 L2 R1 R4 R11 R12 R50 R55 R64 R65 = MainBoard; AUTHOR: Sandor Szilvasi; AUTHOREMAIL: sandor.szilvasi@vanderbilt.edu; PAGE1: Cover Page; PAGE2: FPGA Power Supply; PAGE3: Clock and Reset; PAGE4: Ethernet (RMII); PAGE5: Digital Signal; PAGE6: Analog Front-Ends; PAGE7: Connectors; PAGE9: Caps, Pulls and TPs; REVISION: A; TITLE: Main Board
C37 C47 C48 C52 C53 R14 R15 = MainBoard; DNP: ON
C39 C41 = MainBoard; AUTHOR: Sandor Szilvasi; AUTHOREMAIL: sandor.szilvasi@vanderbilt.edu; PAGE1: Cover Page; PAGE2: Power Supply; PAGE3: Clocks; PAGE4: Ethernet; PAGE5: Digital Signal; PAGE6: Analog Signal; PAGE7: Connectors; REVISION: A; TITLE: Main Board
C45 = MainBoard; VOTLAGE-RATING: 16V
C46 = MainBoard; VOLTAGE-RATING: 16V
C54 C55 R16-R18 R59 = MainBoard; AUTHOR: Sandor Szilvasi; AUTHOREMAIL: sandor.szilvasi@vanderbilt.edu; DNP: ON; PAGE1: Cover Page; PAGE2: FPGA Power Supply; PAGE3: Clock and Reset; PAGE4: Ethernet; PAGE5: Digital Signal; PAGE6: Analog Front-Ends; PAGE7: Connectors; PAGE9: Caps, Pulls and TPs; REVISION: A; TITLE: Main Board
C57 C58 C60 C62 C63 C65 C87 C88 C90 C92 C93 C95 R62 R63 R76 = MainBoard; DNP: on
C71 = MainBoard; AUTHOR: Sandor Szilvasi; AUTHOREMAIL: sandor.szilvasi@vanderbilt.edu; PAGE1: Cover Page; PAGE2: FPGA Power Supply; PAGE3: Clock and Reset; PAGE4: Ethernet; PAGE5: Digital Signal; PAGE6: Analog Signal; PAGE7: Connectors; PAGE9: Caps, Pulls and TPs; REVISION: A; TITLE: Main Board
C116 = MainBoard; AUTHOR: Sandor Szilvasi; AUTHOREMAIL: sandor.szilvasi@vanderbilt.edu; PAGE1: Cover Page; PAGE2: FPGA Power Supply; PAGE3: Clock and Reset; PAGE4: Ethernet; PAGE5: Digital Signal; PAGE6: Analog Front-Ends; PAGE7: Connectors; PAGE9: Caps, Pulls and TPs; RATING: 1000V; REVISION: A; TITLE: Main Board
C138 C140 R60 = MainBoard; AUTHOR: Sandor Szilvasi; AUTHOREMAIL: sandor.szilvasi@vanderbilt.edu; DNP: ON; PAGE1: Cover Page; PAGE2: FPGA Power Supply; PAGE3: Clock and Reset; PAGE4: Ethernet (RMII); PAGE5: Digital Signal; PAGE6: Analog Front-Ends; PAGE7: Connectors; PAGE9: Caps, Pulls and TPs; REVISION: A; TITLE: Main Board
J1 = MainBoard; DIGI-KEY#: H11574CT-ND; MF: Hirose; MPN: ZX62R-B-5P; TEMINATION-TYPE: Right-angle SMT, Horizontal
J3 = MainBoard; DIGI-KEY#: FTSH-105-01-L-DV-K-ND; MF: Samtec; MPN: FTSH-105-01-L-DV-K
J4 = MainBoard; DIGI-KEY#: WM3499CT-ND; MF: Molex; MPN: 71742-3003
J5 = MainBoard; DIGI-KEY#: WM3498CT-ND; MF: Molex; MPN: 71741-0002
LED1 = MainBoard; COLOR: Green; IV: 80mcd@20mA; MF: Kingbright; MPN: APECVA3010MGC; VF: 2.1V
LED2 = MainBoard; COLOR: Orange; IV: 250mcd@20mA; MF: Kingbright; MPN: APECVA3010SECK; VF: 2.1V
LOGO1-LOGO4 = Logo
Q1 = MainBoard; DIGI-KEY#: MMBT3904FSCT-ND; MF: Fairchild Semiconductor; MPN: MMBT3904
R5 R33-R40 R46-R48 R51 R52 R58 = MainBoard; AUTHOR: Sandor Szilvasi; AUTHOREMAIL: sandor.szilvasi@vanderbilt.edu; PAGE1: Cover Page; PAGE2: FPGA Power Supply; PAGE3: Clock and Reset; PAGE4: Ethernet; PAGE5: Digital Signal; PAGE6: Analog Front-Ends; PAGE7: Connectors; PAGE9: Caps, Pulls and TPs; REVISION: A; TITLE: Main Board
R21 R22 = MainBoard; AUTHOR: Sandor Szilvasi; AUTHOREMAIL: sandor.szilvasi@vanderbilt.edu; PAGE1: Cover Page; PAGE2: FPGA Power Supply; PAGE3: Clock and Reset; PAGE4: Ethernet; PAGE5: Digital Signal; PAGE6: Analog Signal; PAGE7: Connectors; REVISION: A; TITLE: Main Board
R53 R54 = MainBoard; TOLERANCE: 1%
SW1 SW2 = MainBoard; DIGI-KEY#: EG4627CT-ND; MF: E-Switch; MPN: TL3340AF160QG
SW3 = MainBoard; DIGI-KEY#: 563-1021-1-ND; MF: CJS; MPN: CJS-1200TA
TP1 TP2 = MainBoard; DIGI-KEY#: 5009K-ND; MF: Keystone; MPN: 5009
TP3 TP4 = MainBoard; DIGI-KEY#: 5121K-ND; MF: Keystone; MPN: 5121
U1 = MainBoard; DIGI-KEY#: 1100-1007-ND; MF: Microsemi; MPN: A2F500M3G-1FGG256; SPEED: 100 MHz
U2 U3 = MainBoard; DIGI-KEY#: MAX19706ETM+-ND; MF: Maxim; MPN: MAX19706ETM+
U4 = MainBoard; DIGI-KEY#: 497-5235-1-ND; MF: STMicroelectronics; MPN: USBLC6-2SC6
U5 = MainBoard; DIGI-KEY#: 768-1101-1-ND; MF: FTDI; MOUSER#: 895-FT232HL-REEL; MPN: 768-1101-1-ND
U6 = MainBoard; DIGI-KEY#: DP83848CVV-ND; MF: National Semiconductor; MPN: DP83848C
U7 = MainBoard; DIGI-KEY#: 93LC56BT-I/OTCT-ND; MF: Microchip Technology; MPN: 93LC56BT-I/OT
U8 = MainBoard; DIGI-KEY#: DS1818R-10+CT-ND; MF: Maxim; MPN: DS1818R-10+T&R; TRIP-POINT: 2.88 V
X1 = MainBoard; CLOAD: 8pF; DIGI-KEY#: XC1556CT-ND; FREQ: 20 MHz; FREQ-STAB: 10 ppm; FREQ-TOLERANCE: 10 ppm; MF: ECS; MPN: ECS-200-8-36CKM
X2 = MainBoard; CLOAD: 7pF; DIGI-KEY#: XC1656CT-ND; FREQ: 32.7kHz; FREQ-TOLERANCE: 20 ppm; MF: ECS; MPN: ECS-.327-7-34B-TR
X3 = MainBoard; DIGI-KEY#: 535-9774-1-ND; FREQ: 50 MHz; FREQ-STABILITY: 50 ppm; MF: Abracon; MPN: ASEM1-50.000MHZ-LC-T
X4 = MainBoard; CLOAD: 9 pF; DIGI-KEY#: XC1608CT-ND; FREQ-STABILITY: 10 ppm; FREQ-TOLERANCE: 10 ppm; MF: ECS; MPN: ECS-120-9-42-CKM-TR

## Nets
!AFE1_SHDN: R24.2 U1.A14 U2.25
!AFE2_SHDN: R30.2 U1.D6 U3.25
!MSS_RESET: R3.2 U1.K4 U6.29
!MSS_RESET_PB: C37.1 R2.1 R3.1 R4.2 SW2.2
!OE: U1.E16 U5.30
!RD: U1.D14 U5.26
!RXF: U1.D13 U5.21
!SIWU: U1.E14 U5.28
!SPI1_SS_AFE1: R23.1 U1.C14 U2.30
!SPI1_SS_AFE2: R29.1 U1.C5 U3.30
!TXE: U1.D15 U5.25
!USB_RESET: C133.1 R57.2 U5.34
!WAKEUP: J4.27 J5.27 R1.2 SW1.2 U1.T16
!WR: U1.E15 U5.27
A1V5: C34.1 C35.1 J4.79 J4.80 J5.79 J5.80 U1.N3 U1.P8 U1.R8
A3V3: C19.1 C20.1 C21.1 C22.1 C23.1 C24.1 C25.1 C69.1 C70.1 C71.1 C72.1 C73.1 C74.1 C75.1 C76.1 C77.1 C78.1 C79.1 C80.1 C81.1 C82.1 C83.1 C99.1 C100.1 C101.1 C102.1 C103.1 C104.1 C105.1 C106.1 C107.1 C108.1 C109.1 C110.1 C111.1 C112.1 C113.1 J4.81 J4.82 J5.81 J5.82 R14.2 U1.N4 U1.N8 U1.N14 U1.P2 U1.P12 U1.P14 U1.R7 U1.R16 U1.T15 U2.2 U2.8 U2.11 U2.31 U2.33 U2.39 U2.43 U2.46 U3.2 U3.8 U3.11 U3.31 U3.33 U3.39 U3.43 U3.46
ACBUS8: U1.E12 U5.32
ACBUS9: U1.F12 U5.33
ADC1+: J5.46 R19.2
ADC1-: J5.44 R20.2
ADC1-IAN: C59.2 R20.1 U2.4
ADC1-IAP: C56.1 R19.1 U2.3
ADC2+: J5.52 R21.2
ADC2-: J5.50 R22.2
ADC2-QAN: C64.2 R22.1 U2.9
ADC2-QAP: C61.1 R21.1 U2.10
ADC3+: J5.70 R25.2
ADC3-: J5.68 R26.2
ADC3-IAN: C89.2 R26.1 U3.4
ADC3-IAP: C86.1 R25.1 U3.3
ADC4+: J5.76 R27.2
ADC4-: J5.74 R28.2
ADC4-QAN: C94.2 R28.1 U3.9
ADC4-QAP: C91.1 R27.1 U3.10
AFE1_CLK: U1.A7 U2.6
AFE1_COM: C68.1 U2.47
AFE1_DB0: U1.B7 U2.13
AFE1_DB1: U1.B8 U2.14
AFE1_DB2: U1.B9 U2.15
AFE1_DB3: U1.A10 U2.16
AFE1_DB4: U1.B10 U2.17
AFE1_DB5: U1.A11 U2.18
AFE1_DB6: U1.B11 U2.21
AFE1_DB7: U1.B12 U2.22
AFE1_DB8: U1.A13 U2.23
AFE1_DB9: U1.B13 U2.24
AFE1_REFN: C67.1 U2.48
AFE1_REFP: C66.1 U2.1
AFE1_T/!R: U1.B14 U2.27
AFE2_CLK: U1.E1 U3.6
AFE2_COM: C98.1 U3.47
AFE2_DB0: U1.C1 U3.13
AFE2_DB1: U1.C3 U3.14
AFE2_DB2: U1.B1 U3.15
AFE2_DB3: U1.B3 U3.16
AFE2_DB4: U1.A3 U3.17
AFE2_DB5: U1.B4 U3.18
AFE2_DB6: U1.A4 U3.21
AFE2_DB7: U1.B5 U3.22
AFE2_DB8: U1.B6 U3.23
AFE2_DB9: U1.A6 U3.24
AFE2_REFN: C97.1 U3.48
AFE2_REFP: C96.1 U3.1
AFE2_T/!R: U1.C6 U3.27
AGND: C1.2 C19.2 C20.2 C21.2 C22.2 C23.2 C24.2 C25.2 C34.2 C35.2 C36.2 C38.2 C39.2 C41.2 C47.2 C48.2 C49.2 C50.2 C51.2 C52.2 C53.2 C54.2 C55.2 C56.2 C57.2 C59.1 C60.1 C61.2 C62.2 C64.1 C65.1 C66.2 C67.2 C68.2 C69.2 C70.2 C71.2 C72.2 C73.2 C74.2 C75.2 C76.2 C77.2 C78.2 C79.2 C80.2 C81.2 C82.2 C83.2 C86.2 C87.2 C89.1 C90.1 C91.2 C92.2 C94.1 C95.1 C96.2 C97.2 C98.2 C99.2 C100.2 C101.2 C102.2 C103.2 C104.2 C105.2 C106.2 C107.2 C108.2 C109.2 C110.2 C111.2 C112.2 C113.2 J4.29 J4.30 J4.35 J4.36 J4.41 J4.42 J4.47 J4.48 J4.53 J4.54 J4.59 J4.60 J4.65 J4.66 J4.71 J4.72 J4.77 J4.78 J4.83 J4.84 J5.29 J5.30 J5.35 J5.36 J5.41 J5.42 J5.47 J5.48 J5.53 J5.54 J5.59 J5.60 J5.65 J5.66 J5.71 J5.72 J5.77 J5.78 J5.83 J5.84 Q1.2 R76.2 TP3.1 TP4.1 U1.D2 U1.J4 U1.M6 U1.M7 U1.M8 U1.M10 U1.N7 U1.N11 U1.N13 U1.P1 U1.P4 U1.P5 U1.P11 U1.P13 U1.T4 U1.T7 U1.T8 U1.T13 U1.T14 U2.5 U2.7 U2.12 U2.32 U2.42 U2.EXP U3.5 U3.7 U3.12 U3.32 U3.42 U3.EXP X1.2 X1.4
ALERT: J4.25 J5.25 U1.J1
AUX_ADC1: U2.35
AUX_ADC2: U2.34
AUX_ADC3: U3.35
AUX_ADC4: U3.34
AUX_DAC1: R15.1 U2.37
AUX_DAC2: R16.1 U2.36
AUX_DAC3: R17.1 U3.37
AUX_DAC4: R18.1 U3.36
COM+: J2.9 R42.1
CRS: R37.2 U6.40
D1V5: C26.1 C30.1 C31.1 C32.1 C33.1 J4.7 J4.8 J5.7 J5.8 L2.2 U1.F8 U1.F10 U1.F16 U1.G7 U1.G9 U1.H8 U1.H10 U1.J7 U1.J9 U1.K8 U1.K10 U1.L7 U1.L9
D3V3: B1.1 C2.1 C3.1 C4.1 C5.1 C6.1 C7.1 C8.1 C9.1 C10.1 C11.1 C12.1 C13.1 C14.1 C15.1 C16.1 C17.1 C42.1 C43.1 C84.1 C85.1 C114.1 C115.1 C127.1 C128.1 C129.1 C130.1 J4.5 J4.6 J5.5 J5.6 L1.2 R1.1 R2.2 R5.2 R11.2 R12.2 R23.2 R29.2 R31.2 R32.2 R41.2 R42.2 R46.2 R47.2 R48.2 R66.2 R67.2 R68.2 R69.2 R70.2 R71.2 U1.A2 U1.A8 U1.A15 U1.C4 U1.C10 U1.D1 U1.D16 U1.E7 U1.E9 U1.E11 U1.E13 U1.F4 U1.F6 U1.G11 U1.H3 U1.H6 U1.J11 U1.J15 U1.K3 U1.K6 U1.L11 U1.M14 U1.N2 U2.20 U3.20 U6.32 U6.48 U8.2 X3.4
DAC1+: C57.1 C58.1 J5.34 U2.41
DAC1-: C58.2 C60.2 J5.32 U2.40
DAC2+: C62.1 C63.1 J5.40 U2.45
DAC2-: C63.2 C65.2 J5.38 U2.44
DAC3+: C87.1 C88.1 J5.58 U3.41
DAC3-: C88.2 C90.2 J5.56 U3.40
DAC4+: C92.1 C93.1 J5.64 U3.45
DAC4-: C93.2 C95.2 J5.62 U3.44
DGND: C2.2 C3.2 C4.2 C5.2 C6.2 C7.2 C8.2 C9.2 C10.2 C11.2 C12.2 C13.2 C14.2 C15.2 C16.2 C17.2 C18.2 C26.2 C27.2 C28.2 C29.2 C30.2 C31.2 C32.2 C33.2 C37.2 C42.2 C43.2 C44.2 C45.2 C46.2 C84.2 C85.2 C114.2 C115.2 C116.2 C118.2 C119.2 C120.2 C121.2 C122.2 C123.2 C124.2 C125.2 C126.2 C127.2 C128.2 C129.2 C130.2 C131.2 C132.2 C133.2 C134.2 C135.2 C136.2 C137.2 C138.2 C139.2 C140.2 C141.2 C142.2 C143.2 C144.2 C145.2 C146.2 C147.2 C148.2 J1.5 J3.2 J3.10 J4.1 J4.2 J4.9 J4.10 J5.1 J5.2 J5.9 J5.10 R6.1 R9.1 R10.1 R24.1 R30.1 R50.1 R53.1 R54.1 R76.1 SW1.1 SW1.3 SW2.1 SW2.3 TP1.1 TP2.1 U1.A1 U1.A5 U1.A9 U1.A12 U1.A16 U1.B2 U1.B15 U1.B16 U1.C7 U1.C13 U1.D3 U1.D4 U1.D12 U1.E5 U1.E6 U1.E8 U1.E10 U1.F2 U1.F7 U1.F9 U1.F11 U1.F13 U1.F15 U1.G6 U1.G8 U1.G10 U1.G16 U1.H1 U1.H7 U1.H9 U1.H11 U1.H16 U1.J5 U1.J6 U1.J8 U1.J10 U1.K7 U1.K9 U1.K11 U1.K13 U1.L1 U1.L6 U1.L8 U1.L10 U1.L16 U1.M4 U1.N15 U2.19 U3.19 U4.2 U5.4 U5.9 U5.10 U5.11 U5.22 U5.23 U5.35 U5.36 U5.41 U5.42 U5.47 U5.48 U6.15 U6.19 U6.35 U6.36 U6.47 U7.2 U8.3 X3.2 X4.2 X4.4
E3V3: B1.2 C118.1 C119.1 C120.1 C121.1 C122.1 J2.4 J2.5 R33.2 R34.2 R35.2 R36.2 R51.2 R52.2 U6.22
EECLK: R59.1 U5.44 U7.4
EECS: R60.1 U5.45 U7.5
EEDATA: R61.2 U5.43 U7.3
EEDO: R58.1 R61.1 U7.1
EGND: C116.1 J2.7 J2.8 J2.H$1 J2.H$2
ETH-RBIAS: R53.2 U6.24
EXTIC-RST: R4.1 U8.1
FPGATAP: R5.1 SW3.1
I2C0_SCL: J4.26 J5.26 R70.1 R72.2
I2C0_SCLI: R72.1 U1.J12
I2C0_SDA: J4.28 J5.28 R71.1 R73.2
I2C0_SDAI: R73.1 U1.J13
JTAGSEL: SW3.2 U1.H15
LED1: LED1.1 U1.H5
LED1H: LED1.2 R66.1
LED2: LED2.1 U1.H4
LED2H: LED2.2 R67.1
LED_ETH_ACT: J2.11 R48.1 U6.26
LED_ETH_LINK: J2.10 R46.1 U6.28
LED_PHY_SPEED: R47.1 U6.27
LPXIN: C39.1 U1.R14 X2.2
LPXOUT: C41.1 U1.R15 X2.1
MAC_CRS: R37.1 U1.L3
MAC_EN: R50.2 U1.J3 U6.7 X3.1
MAC_MDC: U1.K2 U6.31
MAC_MDIO: R31.1 U1.K1 U6.30
MAC_RMII_CLK: R7.2 U1.L5
MAC_RXD0: R44.1 U1.M3
MAC_RXD1: R45.1 U1.N1
MAC_RXER: R43.1 U1.L4
MAC_TXD0: R39.1 U1.M1
MAC_TXD1: R40.1 U1.M2
MAC_TXEN: R38.1 U1.L2
MAINXIN: C36.1 U1.R12 X1.3
MAINXOUT: C38.1 U1.R13 X1.1
MSSTAP: R6.2 SW3.3
NCAP: C40.2 U1.T1
NGPIO0: J5.11 U1.D5
NGPIO1: J5.13 U1.E4
NGPIO2: J5.15 U1.F3
NGPIO3: J5.17 U1.G3
NGPIO4: J5.19 U1.F1
NGPIO5: J5.21 U1.G2
NGPIO6: J5.23 U1.H2
NGPIO7: J5.16 U1.E3
PCAP: C40.1 U1.R1
PFBOUT: C123.1 C124.1 C125.1 C126.1 U6.18 U6.23 U6.37
PHY_RMII_CLK: R8.2 U6.34
RD+: J2.3 R34.1 U6.14
RD-: J2.6 R33.1 U6.13
REF_CLK+: J5.14 U1.C15
REF_CLK-: J5.12 U1.C16
RMII_CLK: R7.1 R8.1 X3.3
RSVD-P20: R51.1 U6.20
RSVD-P21: R52.1 U6.21
RX_DV: R41.1 U6.39
RX_ER: R43.2 U6.41
RXD_0/PHYAD1: R44.2 U6.43
RXD_1/PHYAD2: R45.2 U6.44
SF_ABPS0: J5.75 U1.R3
SF_ABPS1: J5.73 U1.T2
SF_ADC0: J5.49 U1.T5
SF_ADC1: C55.1 J5.51 R18.2 U1.R6
SF_ADC2: J5.55 U1.P7
SF_ADC3: C54.1 J5.57 R17.2 U1.M5
SF_ADC4: J5.45 U1.M9
SF_ADC5: C53.1 J5.43 R16.2 U1.N9
SF_ADC6: J5.39 U1.P9
SF_ADC7: C52.1 J5.37 R15.2 U1.R9
SF_CM0: J5.69 U1.T3
SF_CM1: J5.63 U1.P6
SF_DAC0: C47.1 J5.33 U1.R2
SF_DAC1: C48.1 J5.31 U1.T12
SF_TM0: J5.67 U1.R4
SF_TM1: J5.61 U1.N6
SF_TM3: Q1.1 Q1.3 U1.P10
SGPIO0: J4.17 U1.E2
SGPIO1: J4.19 U1.G1
SPI0_MISO: J4.22 U1.M16
SPI0_MOSI: J4.20 U1.N16
SPI0_SCLK: J4.18 U1.M15
SPI0_SS: J4.24 R68.1 U1.M13
SPI1_MISO: J5.22 U1.L15 U2.26 U3.26
SPI1_MOSI: J5.20 U1.L12 U2.28 U3.28
SPI1_SCLK: J5.18 U1.L14 U2.29 U3.29
SPI1_SS: J5.24 R69.1 U1.L13
TCK: J3.1 R10.2 U1.G15
TD+: J2.1 R36.1 U6.17
TD-: J2.2 R35.1 U6.16
TDI: J3.9 U1.H14
TDO: J3.3 U1.H13
TMS: J3.5 U1.G14
TRST: J3.8 R9.2 U1.G13
TX_EN: R38.2 U6.2
TXD_0: R39.2 U6.3
TXD_1: R40.2 U6.4
U3V3: B3.1 B4.1 C142.1 C143.1 C145.1 C146.1 C147.1 C148.1 R57.1 R58.2 R59.2 R60.2 U5.12 U5.24 U5.39 U5.46 U7.6
UART0_RXD: R63.2 U1.K12
UART0_TXD: R62.2 U1.K16
UART1_RXD: J4.23 R65.1
UART1_RXDI: R65.2 U1.K15
UART1_TXD: J4.21 R64.1
UART1_TXDI: R64.2 U1.K14
UREF: R54.2 U5.5
USB_CLK: R55.2 U1.F14
USB_CLKF: R55.1 U5.29
USB_DB0: R63.1 U1.C8 U5.13
USB_DB1: R62.1 U1.D8 U5.14
USB_DB2: U1.C9 U5.15
USB_DB3: U1.D9 U5.16
USB_DB4: U1.D10 U5.17
USB_DB5: U1.C11 U5.18
USB_DB6: U1.D11 U5.19
USB_DB7: U1.C12 U5.20
USBDM: R74.2 U5.6
USBDM-IN: J1.2 U4.6
USBDM-OUT: R74.1 U4.1
USBDP: R75.2 U5.7
USBDP-IN: J1.3 U4.4
USBDP-OUT: R75.1 U4.3
UXCSI: C131.1 U5.1 X4.3
UXCSO: C132.1 U5.2 X4.1
VAREFIN: C50.1 C51.1 R13.2 R14.1 U1.T6 U1.T9
VAREFOUT: C49.1 R13.1 U1.N12
VBUS: B2.1 C135.1 J1.1 U4.5
VCC3N: C1.1 U1.P3
VCCA: C134.1 U5.37
VCCPLL0: C27.1 C28.1 C29.1 L2.1 U1.C2
VCCRCOSC: C18.1 L1.1 U1.K5
VCORE: C144.1 U5.38
VJTAG: C44.1 J3.6 R11.1 U1.H12
VPHY: B3.2 C138.1 C139.1 U5.3
VPLL: B4.2 C140.1 C141.1 U5.8
VPUMP: C45.1 C46.1 J3.7 R12.1 U1.G12
VREGIN: B2.2 C136.1 C137.1 U5.40
VSUP: J4.3 J4.4 J5.3 J5.4
YEL+: J2.12 R32.1